# Altium PCB cree_lamp.PcbDoc
Units mil, origin at the board's own origin, x right, y up, seen from the top; angles counter-clockwise.
Board outline 1500 x 1075 mil, 2 copper layers (Top Layer, Bottom Layer); 18 components, 13 nets, 55 pads, 9 vias.
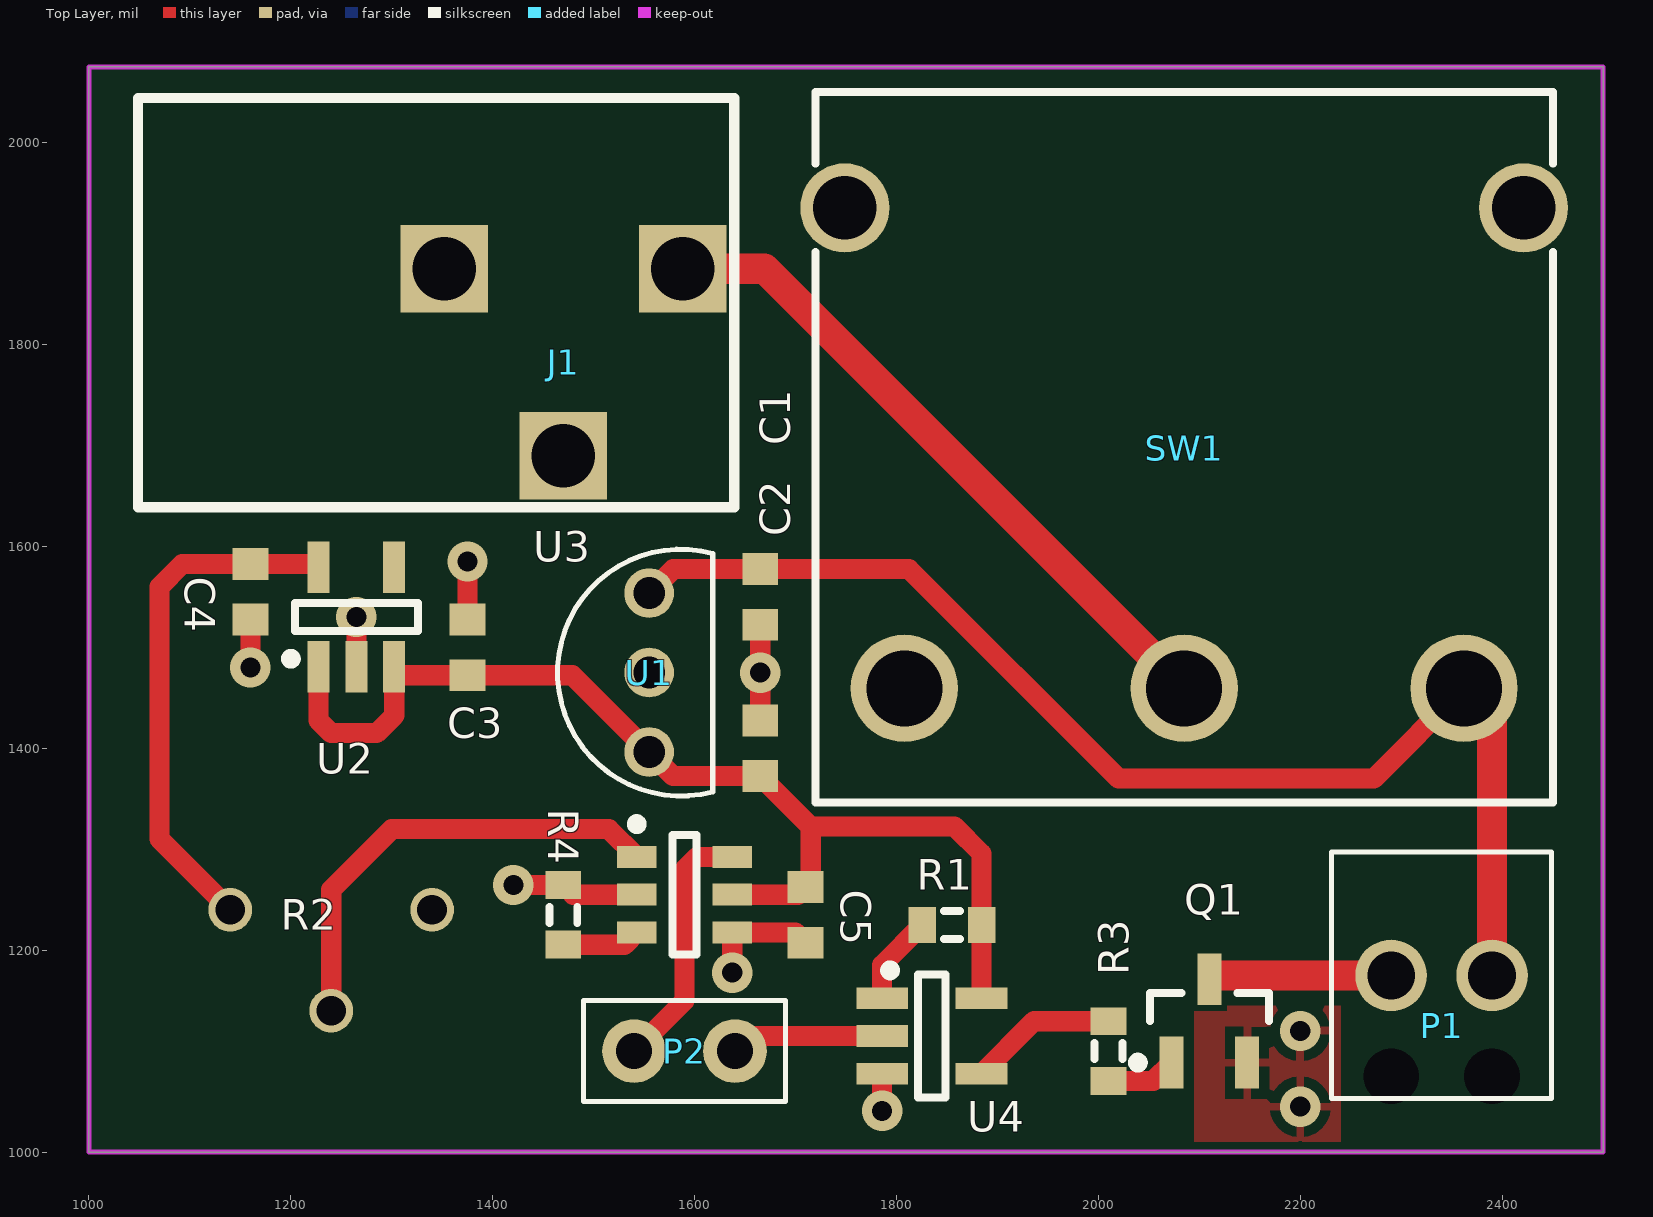
[diagram p0: Top Layer view]
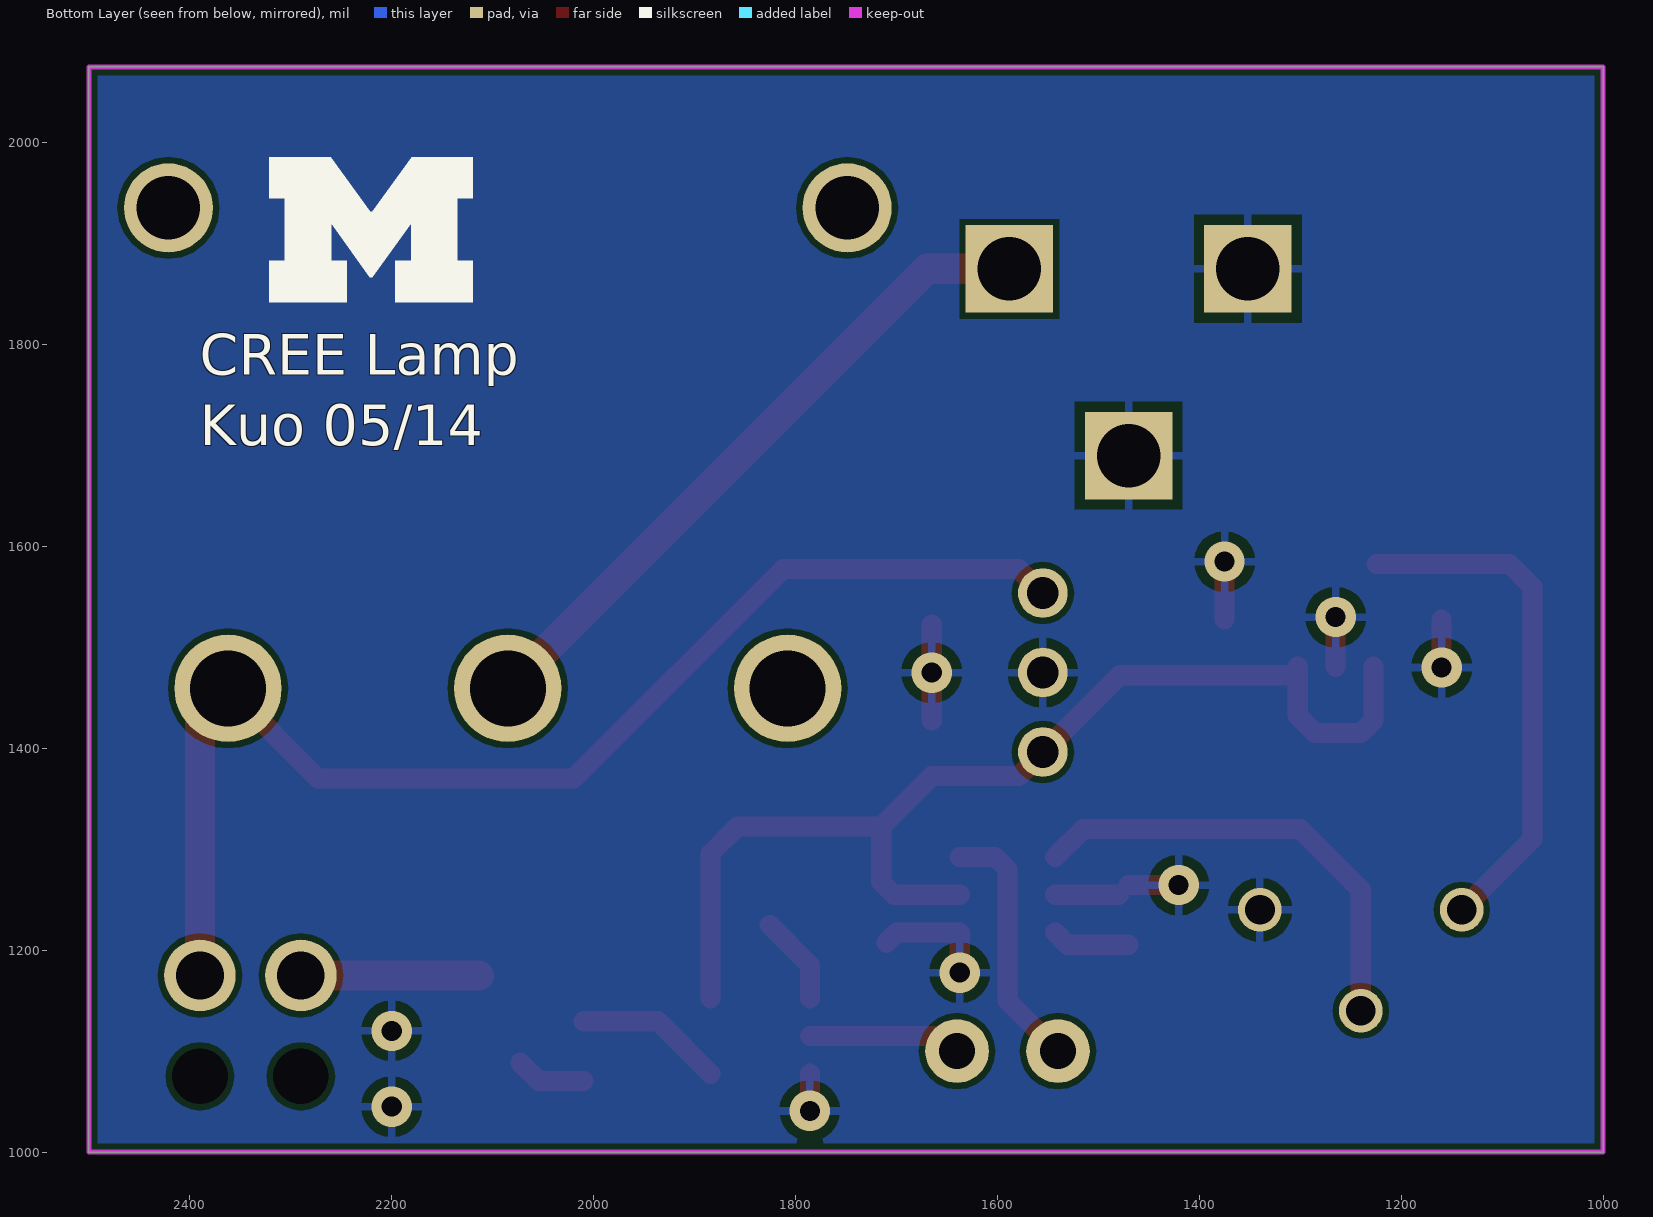
[diagram p1: Bottom Layer view, seen from below]

## Layer stack, top to bottom
Top Solder: solder mask 0.4, Solder Resist, Dk 3.5
Top Layer: signal copper 1.4
Dielectric 1: dielectric 12.6, FR-4, Dk 4.8
Bottom Layer: signal copper 1.4
Bottom Solder: solder mask 0.4, Solder Resist, Dk 3.5

## Board outline
1000,1000 2500,1000 2500,2075 1000,2075

## Design rules (kind name [scope] priority, off if disabled: settings)
Clearance "Clearance~Sunstone Circuits" [All] p1: gap=6 // Sunstone Circuits Minimum Clearance Rule (Double Sided)
HoleSize "HoleSize~Sunstone Circuits" [All] p1: absolutevalues=TRUE maxlimit=251 minlimit=16 maxpercent=80.000 minpercent=20.000 // SSC Hole Size Rule For Single Sided & Double Sided Designs.
HoleSize Testpoint [All] p2: absolutevalues=TRUE maxlimit=100 minlimit=1 maxpercent=80.000 minpercent=20.000
HoleSize TestPointUsage [All] p3: absolutevalues=TRUE maxlimit=100 minlimit=1 maxpercent=80.000 minpercent=20.000
MinimumAnnularRing "MinimumAnnularRing~Sunstone Circuits" [All] p1: minimumring=7 // Sunstone Circuits Minimum Annular Ring (Double Sided)
PlaneClearance "PlaneClearance~Sunstone Circuits" [All] p1: clearance=12 // Sunstone Circuits Power Plane Clearance Rule (Double Sided)
PlaneConnect "PlaneConnect~Sunstone Circuits" [All] p1: planeconnectstyle=Relief reliefexpansion=10 reliefentries=4 reliefconductorwidth=8 reliefairgap=10 // Sunstone Circuits Power Plane Connect Rule (Double Sided)
PolygonConnect "PolygonConnect~Sunstone Circuits" [All] p1: connectstyle=Relief reliefconductorwidth=8 reliefentries=4 polygonreliefangle="90 Angle" airgapwidth=10 // Sunstone Circuits Polygon Connect Style (Double Sided)
RoutingVias "RoutingVias~Sunstone Circuits" [All] p1: holewidth=16 width=30 viastyle="Through Hole" minholewidth=16 minwidth=30 maxholewidth=20 maxwidth=40 // Sunstone Circuits Routing Vias Rule (Double Sided)
ShortCircuit "ShortCircuit~Sunstone Circuits" [All] p1: allowed=FALSE // Sunstone Circuits Short Circuit Rule~Do Not Allow (Double Sided)
SolderMaskExpansion "SolderMaskExpansion~Sunstone Circuits" [All] p1: expansion=3 // Sunstone Circuits Solder Mask Expansion Rule (Double Sided)
ViasUnderSMD "ViasUnderSMD~Sunstone Circuits" [All] p1: allowed=FALSE // Sunstone Circuits Vias Under SMD~Do Not Allow (Double Sided)
Width "Width~Sunstone Circuits" [All] p1: maxlimit=100 minlimit=6 preferedwidth=10 // Sunstone Circuits Minimum Width Rule (Double Sided)
25 further rules are at their usual default settings.

## Components (designator, comment, footprint, x,y, rotation, side; value= is the part's Value field where it differs from the comment)
C1 "Cap Semi" 1608[0603] 1665,1550 r90 top
C2 "Cap Semi" 1608[0603] 1665,1400 r270 top
C3 "Cap Semi" 1608[0603] 1375,1500 r270 top
C4 "Cap Semi" 1608[0603] 1160,1555 r90 top
C5 "Cap Semi" 1608[0603] 1710,1235 r90 top
J1 "PJ-102AH" PJ-102AH 1470,1875 r90 top
P1 "Screw connector" MPT_2position 2340,1175 r0 top
P2 "1 x 2 header" "1x2 header" 1590,1100 r0 top
Q1 "Si2312CDS" SOT95P250-3N 2110,1130 r90 top
R1 "Res3" J1-0603 1855,1225 r0 top
R2 "Trimmer potentiometer" 3386P 1240,1240 r0 top
R3 "Res3" J1-0603 2010,1100 r90 top
R4 "Res3" J1-0603 1470,1235 r270 top
SW1 "D502J12S2AHQF" "Rocker switch" 2085,1420 r270 top
U1 "LM78L05" TO92 1555,1475 r90 top
U2 "LD39015" SOT23-5 1265,1530 r90 top
U3 "LTC6992" TSOT23-6 1590,1255 r0 top
U4 "SN74LVC1G126" SOT23-5 1835,1115 r0 top

## Footprints (in the part's own frame and the unit in brackets; to place one, negate y for a bottom-side part, rotate by r counter-clockwise, add the part's x,y. Pads: shape width x height; smd on the part's side, far side on the other; paste and mask are expansions set on the pad)
"1x2 header" [mm] "1x2 header, 100 mils"
  round 1.6 hole 0.9: 1(-1.27,0) 2(1.27,0)
  silkscreen extent -2.54,-1.27 2.54,1.27, body extent -2.53,-1.26 2.53,1.26, height 8.38
1608[0603] [mm] "Chip Capacitor, Body 1.6x0.8mm, IPC High Density"
  rect 0.8x0.9 smd: 1(-0.7,0) 2(0.7,0)
  body extent -0.87,-0.48 0.87,0.48, height 1.3
3386P [mm] "trimming pot"
  round 1.1 hole 0.75: 1(2.54,0) 2(0,-2.54) 3(-2.54,0)
  body extent -4.8,-4.8 4.8,4.8, height 4.86
J1-0603 [mm] "Chip Resistor, Body 1.6x0.8mm, IPC High Density"
  rect 0.7x0.9 smd: 1(-0.75,0) 2(0.75,0)
  silkscreen extent -0.2,-0.35 0.2,0.35, body extent -0.85,-0.48 0.85,0.48, height 0.9
MPT_2position [mm] "Screw connector 2 pos"
  round 1.8 hole 1.2: 1(-1.27,0) 2(1.27,0)
  round 0 hole 1.4: ""(-1.27,-2.54) ""(1.27,-2.54)
  silkscreen extent -2.77,-3.1 2.77,3.1
PJ-102AH [mm] "Power Jack"
  rect 2.2x2.2 hole 1.6: 1(0,-3) 2(0,3) 3(-4.7,0)
  silkscreen extent -6,-4.3 4.3,10.7, body extent -5.75,-3.99 4.08,10.89, height 10
"Rocker switch" [mm] "PCB through hole right angle"
  round 2.7 hole 1.91: 1(-1,0) 1A(-1,7.04) 1B(-1,-7.04)
  round 2.24 hole 1.6: ""(-13.09,8.54) ""(-13.09,-8.54)
  silkscreen extent -16,-9.28 1.88,9.28
SOT23-5 [mm] "SOT23, 5-Leads, Body 2.9x1.6mm, Pitch 0.95mm, Lead Span 2.8mm, IPC High Density"
  rect 1.3x0.55 smd: 1(-1.25,0.95) 2(-1.25,0) 3(-1.25,-0.95) 4(1.25,-0.95) 5(1.25,0.95)
  silkscreen extent -1.17,-1.55 0.35,1.77, body extent -0.67,-1.5 0.65,1.5, height 1.45
SOT95P250-3N [mm] "SOT23, 3-Leads, Body 2.9x1.3mm, Pitch 0.95mm, Lead Span 2.3mm, IPC Medium Density"
  rect 1.3x0.6 smd: 1(-1.05,0.95) 2(-1.05,-0.95) 3(1.05,0)
  silkscreen extent -1.17,-1.5 0.7,1.92, body extent -0.7,-1.5 0.7,1.5, height 1.2
TO92 [mm]
  round 1.25 hole 0.8: 1(-2,0) 2(0,0) 3(2,0)
  silkscreen extent -3.1,-1.6 3.1,2.3
TSOT23-6 [mm] "SOT23, 6-Leads, Body 3.0x2.9mm (max), Pitch 0.95mm, IPC Medium Density"
  rect 1x0.55 smd: 1(-1.2,0.95) 2(-1.2,0) 3(-1.2,-0.95) 4(1.2,-0.95) 5(1.2,0) 6(1.2,0.95)
  silkscreen extent -1.32,-1.5 0.3,1.9, body extent -0.87,-1.5 0.87,1.5, height 1

## Part data
C1 C2 C3 C4 C5: "Capacitor (Semiconductor SIM Model)"
J1: "CONN PWR JACK 2.1X5.5MM HIGH CUR"
P1: library part MPT_2POS, "Screw connector 2 positions"
P2: "100 mils standard header"
Q1: "N-Channel 20 V (D-S) MOSFET"
R1 R3 R4: "Resistor"
R2: library part potentiometer
SW1: library part "rocker switch", "Miniature Snap-in Power Rocker Switches"
U1: "LM78LXX Series 3-Terminal Positive Regulators"
U2: "150 mA low quiescent current and low noise voltage regulator"
U3: "TimerBlox: Voltage-Controlled Pulse   Width Modulator (PWM)"
U4: "Single Bus Buffer Gate With 3-State Output"

## Via types
v1: diameter 40, hole 20, Top Layer to Bottom Layer, 9 vias

## Nets (pads, with @x,y where several pads share a name; then routed paths per layer and width w, separated by ;. In a path a pad name is that pad's centre, name@x,y a point inside that pad or via, vN(x,y) a via of type N, cw(c..) or ccw(c..) an arc to the next point about the centre after c; other vN are vias at no path point)
GND: C1.1 C2.1 C3.1 C4.1 C5.1 J1.2 J1.3 Q1.2 R2.1 R4.1 U1.2 U2.2 U3.2 U3.4 U4.3 | length 515.3
  Top Layer w20: v1(1160,1480) C4.1 ; U2.2 v1(1265,1530) ; C3.1 v1(1375,1585) ; v1(1420.47,1264.53) R4.1 ; R4.1@1479.53,1255 U3.2 ; v1(1637.24,1177.76) U3.4 1699.84,1217.6 C5.1 ; C2.1 v1(1665,1475) C1.1 ; v1(1785.79,1040.79) U4.3
  other v1: 2200,1045 2200,1120
NetJ1_1: J1.1 SW1.1 | length 669
  Top Layer w30: J1.1 1669.37,1875 SW1.1
NetP1_1: P1.1 Q1.3 | length 176.3
  Top Layer w30: Q1.3@2113.66,1175 P1.1
NetP2_1: P2.1 U3.6 | length 253.1
  Top Layer w20: P2.1 1590,1150 1590,1280 1602.4,1292.4 U3.6
NetP2_2: P2.2 U4.2 | length 152
  Top Layer w20: P2.2 1655,1115 U4.2
NetQ1_1: Q1.1 R3.1 | length 70.1
  Top Layer w20: R3.1 2054.41,1070.47 Q1.1
NetR1_1: R1.1 U4.1 | length 89
  Top Layer w20: U4.1 1785.79,1185.32 R1.1
NetR2_2: R2.2 U3.1 | length 459
  Top Layer w20: R2.2 1240,1260 1300,1320 1515.16,1320 U3.1
NetR3_2: R3.2 U4.4 | length 147.3
  Top Layer w20: U4.4 1936.14,1129.53 R3.2
NetR4_2: R4.2 U3.3 | length 77.8
  Top Layer w20: R4.2 1530.63,1205.47 U3.3
VCC1: C4.2 R2.3 U2.5 | length 512.6
  Top Layer w20: R2.3 1070,1310 1070,1560 1092.56,1582.56 C4.2 U2.5@1224.25,1582.56
VCC5: C2.2 C3.2 C5.2 R1.2 U1.1 U2.1 U2.3 U3.5 U4.5 | length 1116.8
  Top Layer w20: U2.1 1227.6,1427.4 1240,1415 1285,1415 1302.4,1432.4 U2.3 ; U2.3@1310.75,1472.44 C3.2 1478.82,1472.44 U1.1 1578.82,1372.44 C2.2 1715,1322.44 ; U3.5 1702.44,1255 C5.2 1715,1267.56 1715,1322.44 ; U4.5 1884.21,1295.79 1857.56,1322.44 1715,1322.44
VIN: C1.2 P1.2 SW1.1A U1.3 | length 1235.9
  Top Layer w20: U1.3 1578.82,1577.56 C1.2 1812.44,1577.56 2020,1370 2272.8,1370 SW1.1A
  Top Layer w30: SW1.1A 2390,1431.54 P1.2
pads on no net: P1. SW1. SW1.1B U2.4

## Polygon pours and split planes (outlines as drawn)
GND on Top Layer "Bottom Layer-No Net" (solid, pour order 2): 2095,1145 2095,1010 2240,1010 2240,1145
GND on Bottom Layer "Bottom Layer-No Net" (solid, pour order 4): 1000,1000 2500,1000 2500,2075 1005,2075

## Keep-outs
Keep-Out Layer:
  the board outline again, w5

## Silkscreen, mask and mechanical layers (free items; w line width, h text height)
Bottom Overlay:
  region: 2321.12,1841.98 2244.4,1841.98 2244.4,1882.94 2260,1882.94 2260,1920 2221.96,1866.68 2219.36,1866.68 2180.68,1920 2180.68,1882.94 2196.28,1882.94 2196.28,1841.98 2119.56,1841.98 2119.56,1882.94 2135.16,1882.94 2135.16,1944.71 2119.56,1944.71 2119.56,1985.67 2180.35,1985.67 2219.36,1931.7 2221.31,1931.7 2260.33,1985.67 2321.12,1985.67 2321.12,1944.71 2306.16,1944.71 2306.16,1882.94 2321.12,1882.94
  text "CREE Lamp" at 2390,1770 h40
  text "Kuo 05/14" at 2390,1700 h40